# EAGLE board myboard v3 (EAGLE 6.5.0)
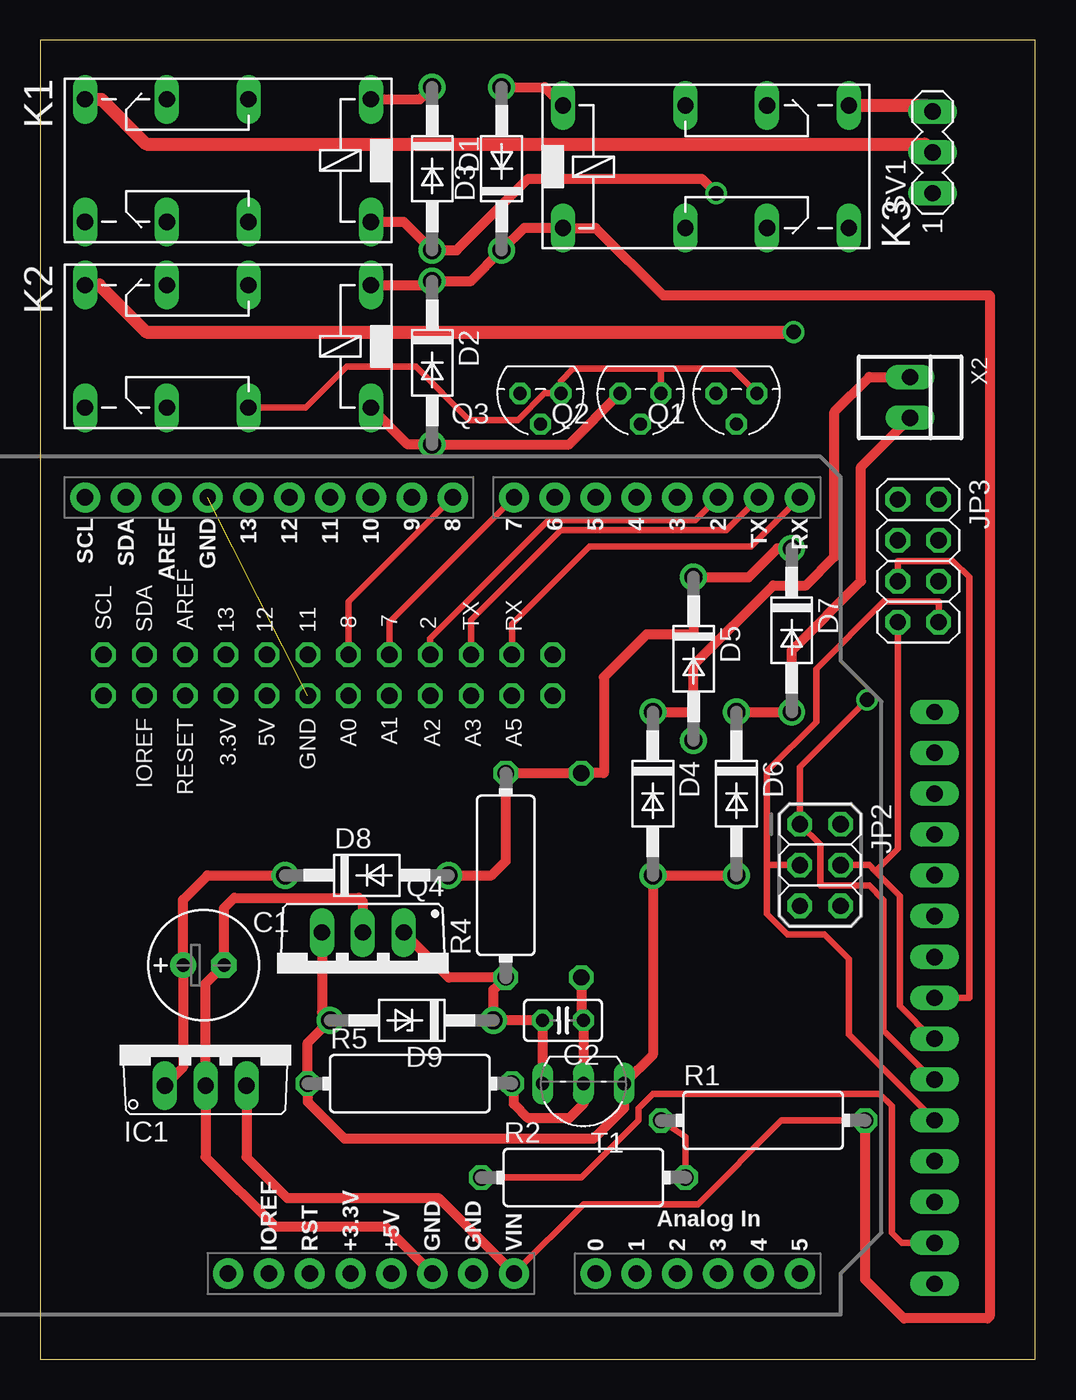
[diagram p0: board, top side]
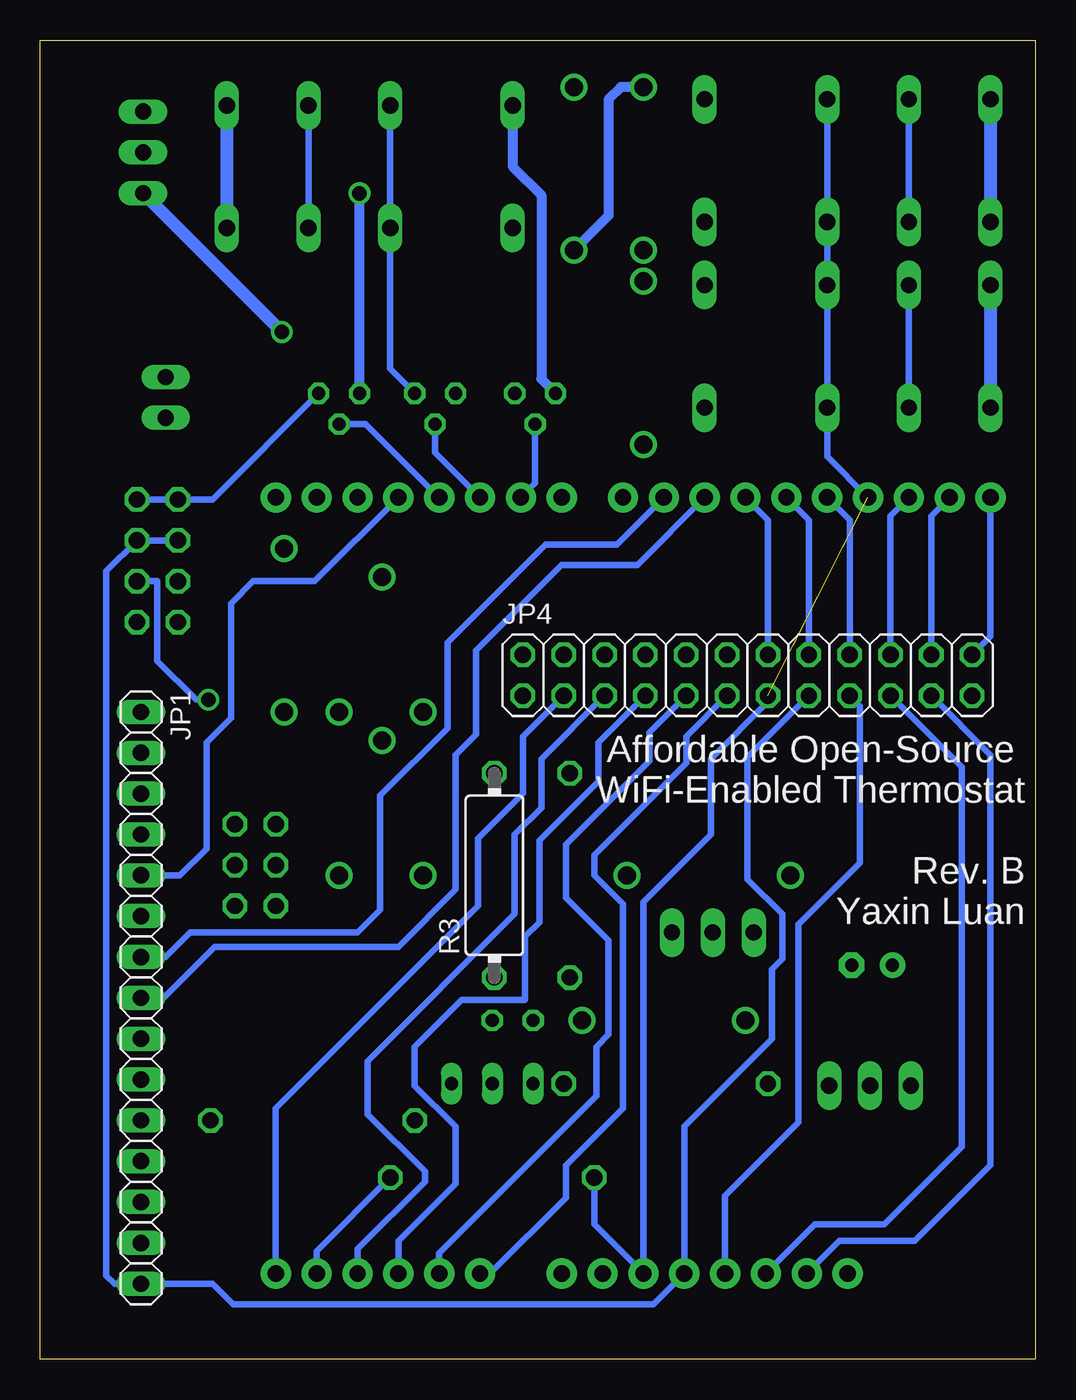
[diagram p1: board, bottom side, seen from below]

Size 61.9 x 82.03 mm. Coordinates in mm from the lower left corner, seen from the top.
Outline: 0,0 61.9,0 61.9,82.03 0,82.03 0,0
Copper layers (1*16): Top 0.035mm / dielectric 1.5mm / Bottom 0.035mm
Design rules "default": minimum track width 10mil, minimum drill 24mil, track to track 8mil, track to pad 8mil, pad to pad 8mil, via to via 8mil, smd to smd 8mil, copper to edge 40mil, drill to drill 8mil, minimum pad ring 10mil, minimum via ring 8mil, stop-mask expansion 4mil, vias tented up to drill 0mil, thermal gap 10mil

## Footprints (pad centres in the part's own frame; a part is rotated, then mirrored left to right if it is on the bottom)
E2,5-7 = drill 0.813 pad 1.6: + -1.27,0 | drill 0.813 pad 1.6 octagon: - 1.27,0
C025-025X050 = drill 0.813 octagon: 1 -1.27,0; 2 1.27,0
DO41-10 = drill 1.118: A 5.08,0; C -5.08,0
DO41Z10 = drill 1.118: A 5.08,0; C -5.08,0
TO220V = drill 1.016 long: 1 -2.54,-2.54; 2 0,-2.54; 3 2.54,-2.54
1X15 = drill 1.016 long: 1 -17.78,0; 2 -15.24,0; 3 -12.7,0; 4 -10.16,0; 5 -7.62,0; 6 -5.08,0; 7 -2.54,0; 8 0,0; 9 2.54,0; 10 5.08,0; 11 7.62,0; 12 10.16,0; 13 12.7,0; 14 15.24,0; 15 17.78,0
2X03 = drill 1.016 octagon: 1 -2.54,-1.27; 2 -2.54,1.27; 3 0,-1.27; 4 0,1.27; 5 2.54,-1.27; 6 2.54,1.27
2X04 = drill 1.016 octagon: 1 -3.81,-1.27; 2 -3.81,1.27; 3 -1.27,-1.27; 4 -1.27,1.27; 5 1.27,-1.27; 6 1.27,1.27; 7 3.81,-1.27; 8 3.81,1.27
2X12 = drill 1.016 octagon: 1 -13.97,-1.27; 2 -13.97,1.27; 3 -11.43,-1.27; 4 -11.43,1.27; 5 -8.89,-1.27; 6 -8.89,1.27; 7 -6.35,-1.27; 8 -6.35,1.27; 9 -3.81,-1.27; 10 -3.81,1.27; 11 -1.27,-1.27; 12 -1.27,1.27; 13 1.27,-1.27; 14 1.27,1.27; 15 3.81,-1.27; 16 3.81,1.27; 17 6.35,-1.27; 18 6.35,1.27; 19 8.89,-1.27; 20 8.89,1.27; 21 11.43,-1.27; 22 11.43,1.27; 23 13.97,-1.27; 24 13.97,1.27
351 = drill 1.016 long: 1 -3.81,-3.81; 16 -3.81,3.81; O1 8.89,-3.81; O2 8.89,3.81; P1 3.81,-3.81; P2 3.81,3.81; S1 13.97,-3.81; S2 13.97,3.81
TO-92 = drill 0.813 octagon: 1 -1.27,0; 2 0,1.905; 3 1.27,0
TO220BV = drill 1.016 long: D 0,-2.54; G -2.54,-2.54; S 2.54,-2.54
V234/12 = drill 1.016 octagon: 1 -6.35,0; 2 6.35,0
MA03-1 = drill 1.016 long: 1 -2.54,0; 2 0,0; 3 2.54,0
TO92-EBC = drill 0.813 long: B 0,-1.27; C 2.54,-1.27; E -2.54,-1.27
UNO_R3_SHIELD = drill 1.016 pad 1.88: 3.3V 50.8,26.67; 5V 50.8,29.21; A0 50.8,41.91; A1 50.8,44.45; A2 50.8,46.99; A3 50.8,49.53; A4 50.8,52.07; A5 50.8,54.61; AREF 2.54,15.24; D2 2.54,49.53; D3 2.54,46.99; D4 2.54,44.45; D5 2.54,41.91; D6 2.54,39.37; D7 2.54,36.83; D8 2.54,33.02; D9 2.54,30.48; D10 2.54,27.94; D11 2.54,25.4; D12 2.54,22.86; D13 2.54,20.32; GND@0 50.8,31.75; GND@1 50.8,34.29; GND@2 2.54,17.78; IOREF 50.8,21.59; NC 50.8,19.05; RES 50.8,24.13; RX 2.54,54.61; SCL 2.54,10.16; SDA 2.54,12.7; TX 2.54,52.07; VIN 50.8,36.83
22-23-2021 = drill 1 long: 1 -1.27,0; 2 1.27,0

## Placement (x,y rotation side)
C1  100uF  [E2,5-7]  10.16,24.51 0 top
C2  220pF  [C025-025X050]  32.51,21.08 180 top
D1  1N4004  [DO41-10]  24.38,74.04 270 top
D2  1N4004  [DO41-10]  24.38,61.98 270 top
D3  1N4004  [DO41-10]  28.7,74.04 90 top
D4  1N4004  [DO41-10]  38.1,35.18 270 top
D5  1N4004  [DO41-10]  40.64,43.56 270 top
D6  1N4004  [DO41-10]  43.31,35.18 270 top
D7  1N4004  [DO41-10]  46.74,45.34 270 top
D8  1N4004  [DO41-10]  20.32,30.1 0 top
D9  1N4728  [DO41Z10]  23.11,21.08 180 top
IC1  786TV  [TO220V]  10.29,19.56 0 top
JP1  [1X15]  55.63,22.48 270 bottom
JP2  [2X03]  48.51,30.73 270 top
JP3  [2X04]  54.61,49.66 270 top
JP4  [2X12]  17.91,42.55 0 bottom
K1  351  [351]  16.76,74.55 180 top
K2  351  [351]  16.76,62.99 180 top
K3  351  [351]  36.32,74.17 0 top
Q1  TN0602N3  [TO-92]  43.31,60.07 180 top
Q2  TN0602N3  [TO-92]  37.34,60.07 180 top
Q3  TN0602N3  [TO-92]  31.11,60.07 180 top
Q4  IRF740  [TO220BV]  20.07,24 180 top
R1  [V234/12]  44.96,14.86 0 top
R2  [V234/12]  33.78,11.3 0 top
R3  360k  [V234/12]  33.66,30.1 90 bottom
R4  47k  [V234/12]  28.96,30.1 90 top
R5  10k  [V234/12]  22.99,17.14 0 top
SV1  [MA03-1]  55.5,75.06 90 top
T1  [TO92-EBC]  33.78,15.88 180 top
U$1  ARDUINO_R3_SHIELD  [UNO_R3_SHIELD]  -7.37,56.13 270 top
X2  22-23-2021  [22-23-2021]  54.1,59.82 270 top

## Library data of the parts
C1 C2 = rcl
D1-D9 = diode
IC1 = linear
JP1-JP4 = pinhead
K1-K3 = relay; OC_FARNELL: unknown; OC_NEWARK: unknown
Q1-Q3 = transistor-fet
Q4 = transistor-power
R1-R5 = resistor
SV1 = con-lstb; OC_FARNELL: unknown; OC_NEWARK: unknown
T1 = transistor-neu-to92
U$1 = SparkFun-Boards
X2 = con-molex; MF: MOLEX; MPN: 22-23-2021; OC_FARNELL: 1462926; OC_NEWARK: 25C3832

## Nets
N$2: D3.A K3.16 Q3.3
N$3: C1.- IC1.2 JP1.14 JP3.1 JP3.2 JP4.13 K1.P1 K1.P2 K2.P1 K2.P2 K3.P1 K3.P2 Q1.1 Q2.1 Q3.1 Q4.D R2.1 U$1.GND@0 U$1.GND@2
N$4: K1.S1 K1.S2 SV1.2
N$5: K1.O1 K1.O2
N$6: D2.A K2.16 Q2.3
N$7: K2.S1 K2.S2 SV1.1
N$8: K2.O1 K2.O2
N$9: D4.A D6.A D9.A Q4.S R5.1 T1.E
N$11: K3.S1 K3.S2 SV1.3
N$12: K3.O1 K3.O2
N$13: JP1.10 JP2.1 JP3.6
N$14: D5.C D7.C D8.A R3.2 R4.2
N$15: D1.C D2.C D3.C IC1.3 K1.1 K2.1 K3.1 R1.2 U$1.VIN
N$16: JP1.8 JP3.5 U$1.D10
N$17: JP1.7 U$1.D9
N$18: C2.1 R3.1 R5.2 T1.B
N$19: R1.1 R2.2 U$1.A4
N$20: C2.2 D9.C Q4.G R4.1 T1.C
N$21: JP1.5 U$1.D3
N$23: JP1.11 JP2.3 JP3.8
N$24: JP1.9 JP2.4 JP3.7
N$27: JP4.3 U$1.A5
N$28: C1.+ D8.C IC1.1
N$29: D6.C D7.A X2.2
N$30: D4.C D5.A X2.1
N$31: Q2.2 U$1.D5
N$32: JP4.5 U$1.A3
N$33: JP1.15 JP3.3 JP3.4 JP4.15 U$1.5V
N$34: JP4.7 U$1.A2
N$35: JP4.9 U$1.A1
N$36: JP4.11 U$1.A0
N$38: JP4.20 U$1.AREF
N$39: JP4.17 U$1.3.3V
N$40: Q3.2 U$1.D6
N$41: JP4.19 U$1.RES
N$42: Q1.2 U$1.D4
N$43: JP4.21 U$1.IOREF
N$44: JP4.4 U$1.RX
N$45: JP4.6 U$1.TX
N$46: JP4.8 U$1.D2
N$47: JP4.10 U$1.D7
N$48: JP4.12 U$1.D8
N$49: JP4.14 U$1.D11
N$50: JP4.16 U$1.D12
N$51: JP4.18 U$1.D13
N$52: JP4.22 U$1.SDA
N$53: JP4.24 U$1.SCL
N$54: D1.A K1.16 Q1.3

## Tracks (layer width: path | path; a pad name or v marks a point on that pad's centre or on a via)
N$2
  Top 0.61: D3.A 31.37,79.12 K3.16
  Bottom 0.61: K3.16 32.51,74.17 30.73,72.39 30.73,60.96 Q3.3
N$3  (1 unrouted)
  Top 0.406: 38.61,61.59 33.15,61.59 32.38,60.83 Q3.1 31.37,60.07 29.72,58.42 26.67,58.42 23.37,61.72 19.05,61.72 16.51,59.18 K2.P2 | 38.61,61.59 43.05,61.59 Q1.1 | Q2.1 38.61,61.59 | R2.1 33.66,11.3 37.21,14.86 37.21,15.62 38.1,16.51 52.2,16.51 52.96,15.75 52.96,7.87 53.59,7.24 JP1.14
  Top 0.61: Q4.D 20.07,28.45 19.81,28.7 12.06,28.7 11.43,28.07 C1.- 10.29,23.37 IC1.2 10.29,12.57 14.61,8.26 21.46,8.26 U$1.GND@0
  Bottom 0.406: K1.P1 K1.P2 K2.P1 K2.P2 12.95,56.13 U$1.GND@2 | K3.P2 K3.P1 40.13,61.59 Q2.1 | JP3.2 JP3.1 51.18,53.47 Q1.1 | R2.1 27.43,8.38 U$1.GND@0 24.38,28.45 20.19,32.64 20.19,37.34 16.64,40.89 JP4.13
N$4
  Top 0.813: K1.S1 3.81,78.36 6.6,75.56 54.99,75.56 SV1.2
  Bottom 0.813: K1.S1 K1.S2
N$5
  Bottom 0.406: K1.O2 K1.O1
N$6
  Top 0.61: K2.16 22.86,56.9 D2.A 32.89,56.9 Q2.3
N$7  (via drill 0.9)
  Top 0.813: K2.S1 3.68,66.8 6.6,63.88 v46.86,63.88
  Bottom 0.813: K2.S1 K2.S2 | v46.86,63.88 SV1.1
N$8
  Bottom 0.406: K2.O2 K2.O1
N$9
  Top 0.61: D6.A D4.A 38.1,18.92 T1.E 36.32,15.62 34.42,13.72 18.92,13.72 16.64,16 R5.1 16.64,19.68 D9.A 17.53,21.59 Q4.S
N$11
  Top 0.813: K3.S2 55.12,77.98 SV1.3
  Bottom 0.813: K3.S2 K3.S1
N$12
  Bottom 0.406: K3.O1 K3.O2
N$13  (via drill 0.9)
  Top 0.406: JP1.10 55.5,17.4 52.45,20.45 52.45,28.57 51.56,29.46 48.51,29.46 48.51,32 JP2.1 47.24,36.83 v51.44,41.02
  Bottom 0.406: JP3.6 54.61,48.39 54.61,43.43 52.2,41.02 v51.44,41.02
N$14
  Top 0.61: D8.A 28.07,30.1 28.96,30.99 R4.2 R3.2 35.05,36.45 35.05,42.42 37.72,45.09 40.51,45.09 40.64,45.21 D5.C 44.07,48.64 45.85,50.42 D7.C
N$15
  Top 0.406: R1.2 46.1,14.86 40.89,9.65 33.78,9.65 U$1.VIN
  Top 0.61: K1.1 23.62,78.36 D1.C | K2.1 24.13,66.8 D2.C 26.8,67.06 D3.C 30.1,70.36 K3.1 34.54,70.36 38.73,66.17 59.05,66.17 59.05,2.67 58.93,2.54 53.72,2.54 51.31,4.95 R1.2 | IC1.3 12.83,12.57 15.37,10.03 24.77,10.03 U$1.VIN
  Bottom 0.61: D1.C 25.78,79.12 26.54,78.36 26.54,71.12 D3.C
N$16
  Top 0.406: JP1.8 57.78,22.48 57.78,48.64 56.77,49.66 53.34,49.66 JP3.5
  Bottom 0.406: JP1.8 54.23,22.48 51.05,25.65 39.62,25.65 36.07,29.21 36.07,37.59 34.8,38.86 34.8,44.07 29.46,49.4 24.77,49.4 U$1.D10
N$17
  Bottom 0.406: U$1.D9 26.04,50.67 30.48,50.67 36.58,44.58 36.58,39.24 40.77,35.05 40.77,27.94 42.16,26.54 52.58,26.54 54.1,25.02 JP1.7
N$18
  Top 0.61: R3.1 33.66,21.21 C2.1 T1.B 33.78,15.88 32.89,14.99 30.35,14.99 29.46,15.88 29.46,17.02 R5.2
N$19
  Top 0.406: R1.1 40.13,13.84 R2.2
  Bottom 0.406: U$1.A4 44.7,6.73 R2.2
N$20
  Top 0.61: Q4.G 25.4,23.75 R4.1 28.19,22.99 D9.C C2.2 T1.C
N$21
  Bottom 0.406: JP1.5 53.21,30.1 51.56,31.75 51.56,38.35 50.04,39.88 50.04,46.99 48.64,48.39 44.83,48.39 U$1.D3
N$23
  Top 0.406: JP1.11 50.29,20.19 50.29,24.89 48.77,26.42 46.48,26.42 45.21,27.69 45.21,30.73 | 45.21,30.73 JP2.3 | 45.21,30.73 45.21,36.58 48.26,39.62 48.26,42.93 52.45,47.12 55.88,47.12 JP3.8
N$24
  Top 0.406: JP1.9 55.5,19.94 53.47,21.97 53.47,28.83 51.94,30.35 | 51.94,30.35 51.56,30.73 JP2.4 | JP3.7 53.34,31.75 51.94,30.35
N$27
  Bottom 0.406: U$1.A5 47.24,15.62 34.67,28.19 34.67,32.38 31.88,35.18 31.88,38.73 JP4.3
N$28
  Top 0.61: D8.C 10.41,30.1 8.89,28.57 C1.+ 8.89,18.16 IC1.1
N$29
  Top 0.61: D6.C D7.A 46.74,44.07 51.05,48.39 51.05,55.5 X2.2
N$30
  Top 0.61: D5.A 40.64,40.26 | 40.64,40.26 40.64,43.18 45.59,48.13 47.62,48.13 49.4,49.91 49.4,58.93 51.56,61.09 X2.1 | D4.C 40.64,40.26
N$31
  Bottom 0.406: Q2.2 37.34,56.39 U$1.D5
N$32
  Bottom 0.406: U$1.A3 42.16,6.86 37.97,11.05 37.97,11.68 41.53,15.24 41.53,18.54 32.38,27.69 32.38,32.64 30.73,34.29 30.73,37.34 JP4.5
N$33
  Bottom 0.406: JP3.3 JP3.4 57.78,49.02 57.78,5.21 57.28,4.7 JP1.15 51.18,4.7 49.91,3.43 23.75,3.43 U$1.5V 21.84,14.48 16.38,19.94 16.38,24.26 15.75,24.89 15.75,27.69 17.91,29.84 17.91,37.47 JP4.15
N$34
  Bottom 0.406: U$1.A2 39.62,7.37 36.07,10.92 36.07,14.48 38.61,17.02 38.61,19.43 35.69,22.35 31.75,22.35 31.75,26.29 30.86,27.18 30.86,32.26 27.18,35.94 27.18,38.35 JP4.7
N$35
  Bottom 0.406: U$1.A1 37.08,6.6 27.3,16.38 27.3,19.43 26.54,20.19 26.54,26.04 29.21,28.7 29.21,32 24,37.21 24,38.99 JP4.9
N$36
  Bottom 0.406: U$1.A0 33.91,5.33 29.21,10.03 29.21,12.06 25.65,15.62 25.65,28.32 27.43,30.1 27.43,31.37 21.72,37.08 21.72,38.73 JP4.11
N$38
  Bottom 0.406: JP4.20 9.02,52.45 U$1.AREF
N$39
  Bottom 0.406: U$1.3.3V 19.3,10.16 14.73,14.73 14.73,27.05 10.92,30.86 10.92,40.64 JP4.17
N$40
  Bottom 0.406: Q3.2 31.11,54.48 U$1.D6
N$41
  Bottom 0.406: U$1.RES 13.72,8.38 9.4,8.38 4.57,13.21 4.57,36.83 JP4.19
N$42
  Bottom 0.406: Q1.2 41.66,58.17 U$1.D4
N$43
  Bottom 0.406: JP4.21 2.79,37.59 2.79,12.06 7.49,7.37 12.19,7.37 U$1.IOREF
N$44
  Top 0.406: JP4.4 29.34,45.72 34.16,50.55 44.2,50.55 U$1.RX
N$45
  Top 0.406: JP4.6 26.8,45.97 32.38,51.56 42.67,51.56 U$1.TX
N$46
  Top 0.406: JP4.8 24.26,44.83 31.62,52.2 40.77,52.2 U$1.D2
N$47
  Top 0.406: JP4.10 21.72,45.85 U$1.D7
N$48
  Top 0.406: JP4.12 19.18,47.12 U$1.D8
N$49
  Bottom 0.406: JP4.14 16.64,52.2 U$1.D11
N$50
  Bottom 0.406: JP4.16 14.1,52.2 U$1.D12
N$51
  Bottom 0.406: JP4.18 11.56,52.2 U$1.D13
N$52
  Bottom 0.406: JP4.22 6.48,52.45 U$1.SDA
N$53
  Bottom 0.406: U$1.SCL 2.79,44.96 JP4.24
N$54  (via drill 0.9)
  Top 0.61: K1.16 22.61,70.74 D1.A 25.91,68.96 30.35,73.41 41.15,73.41 v42.04,72.52
  Bottom 0.61: Q1.3 v42.04,72.52

## Text on the board
_tsilk: RX | 7 | 2 | SCL | SDA | AREF | 13 | 12 | 11 | 8 | TX | IOREF | RESET | 3.3V | 5V | GND | A0 | A1 | A2 | A3 | A5
_bsilk: Affordable Open-Source / WiFi-Enabled Thermostat / / Rev. B / Yaxin Luan